# Altium PCB AcousticsSingleChannel.PcbDoc
Units mil, origin at the board's own origin, x right, y up, seen from the top; angles counter-clockwise.
Board outline 1008.83 x 2053.63 mil, 4 copper layers (Top Layer, Int1 (GND), Int2 (AGND), Bottom Layer), stack 53.912 mil thick; 53 components, 35 nets, 154 pads, 35 vias.
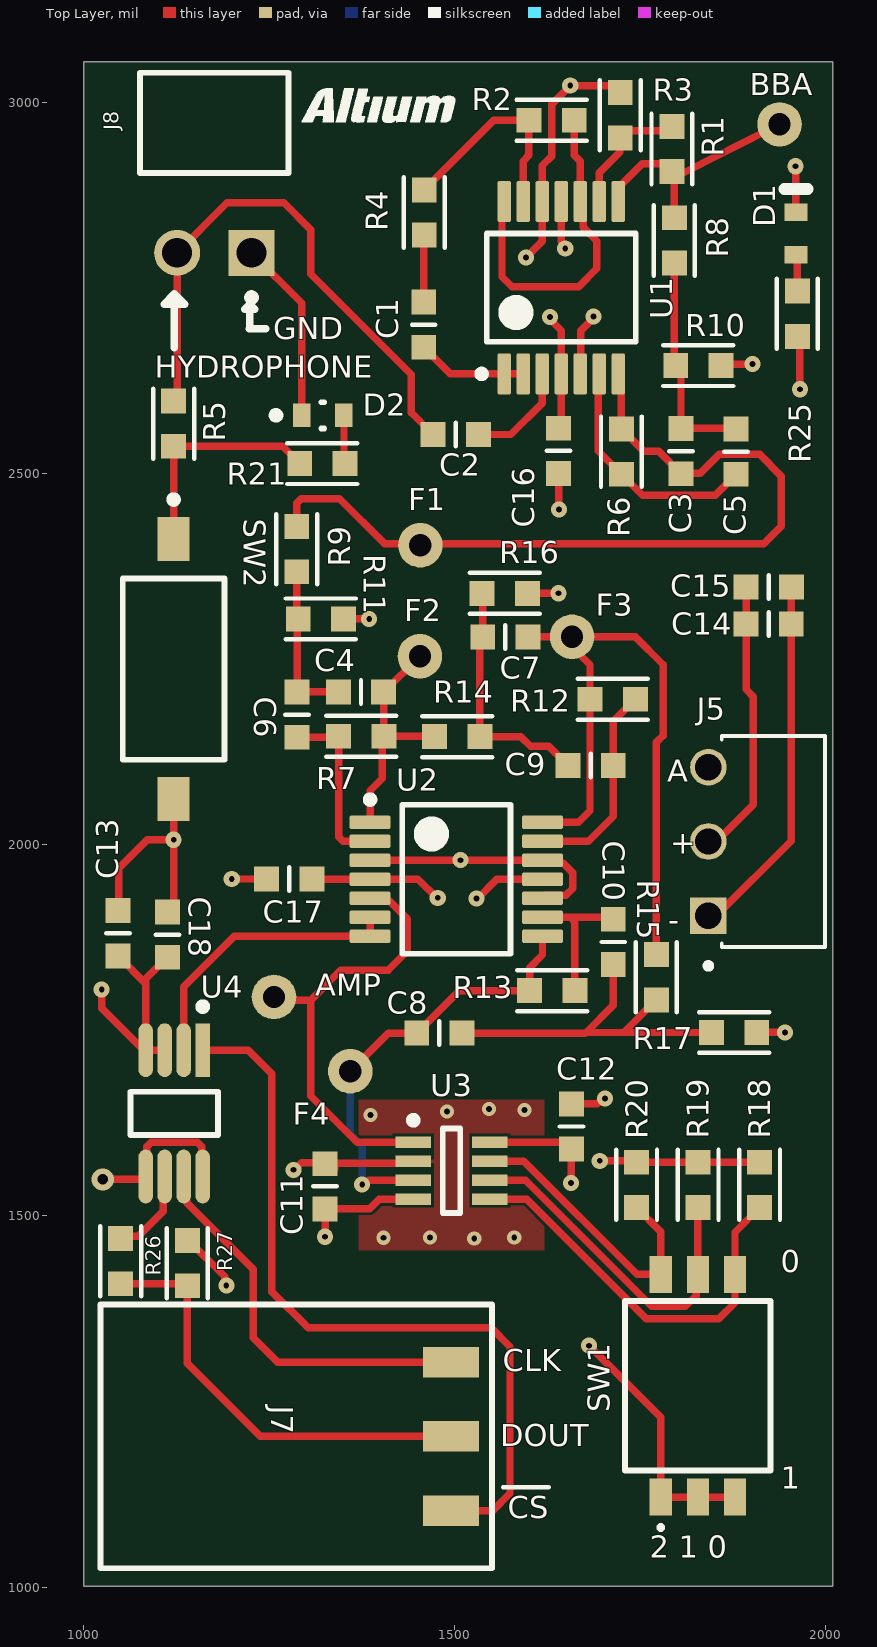
[diagram p0: Top Layer view]
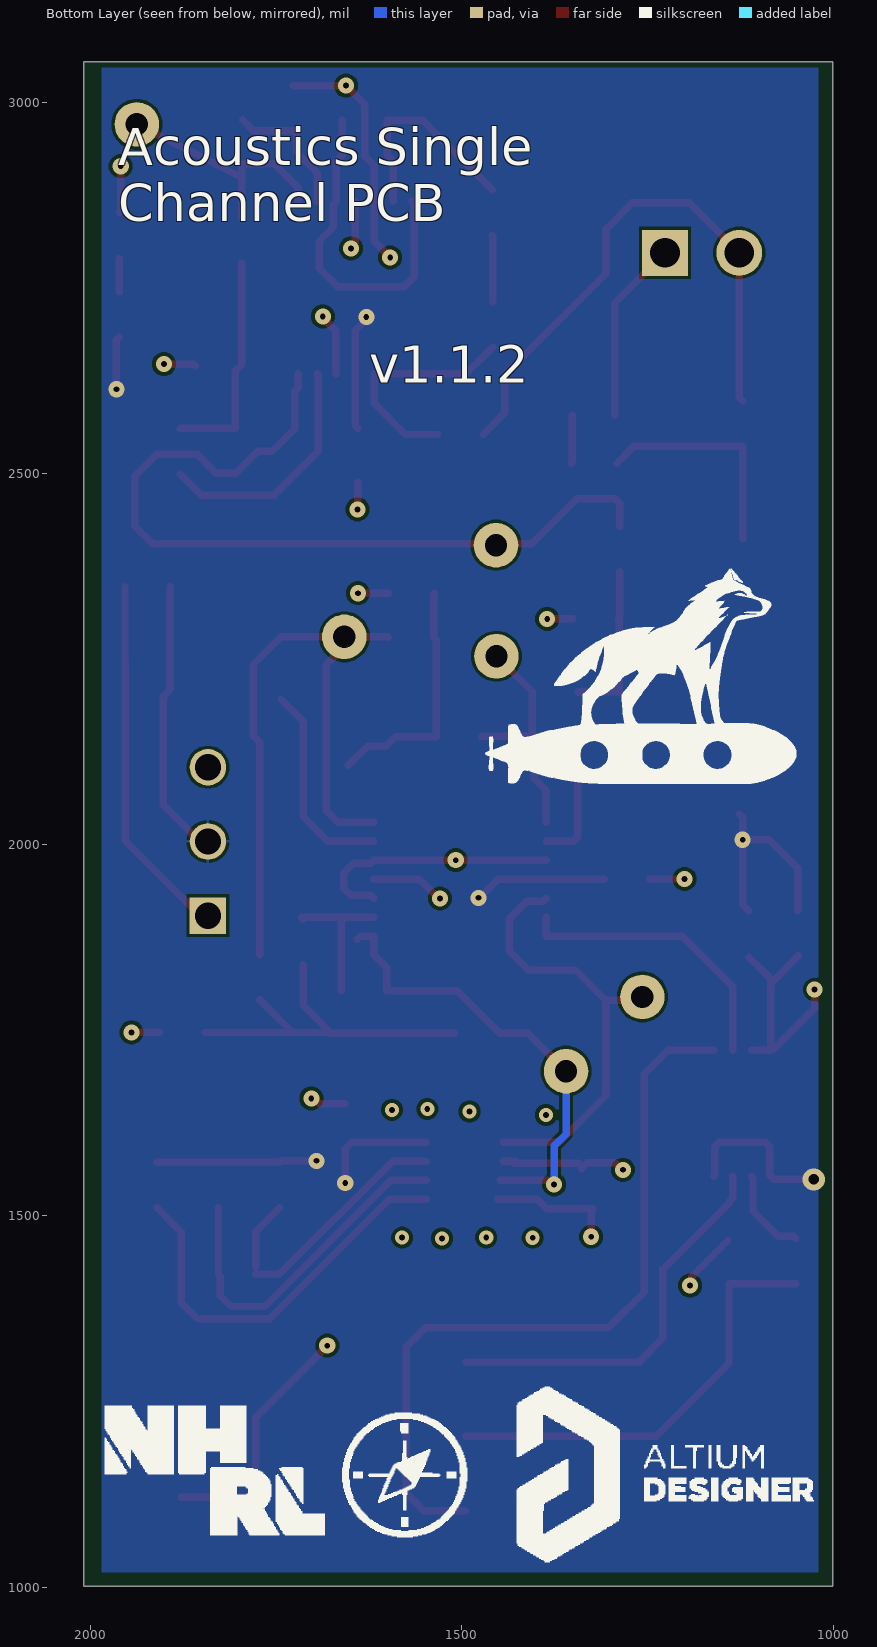
[diagram p1: Bottom Layer view, seen from below]
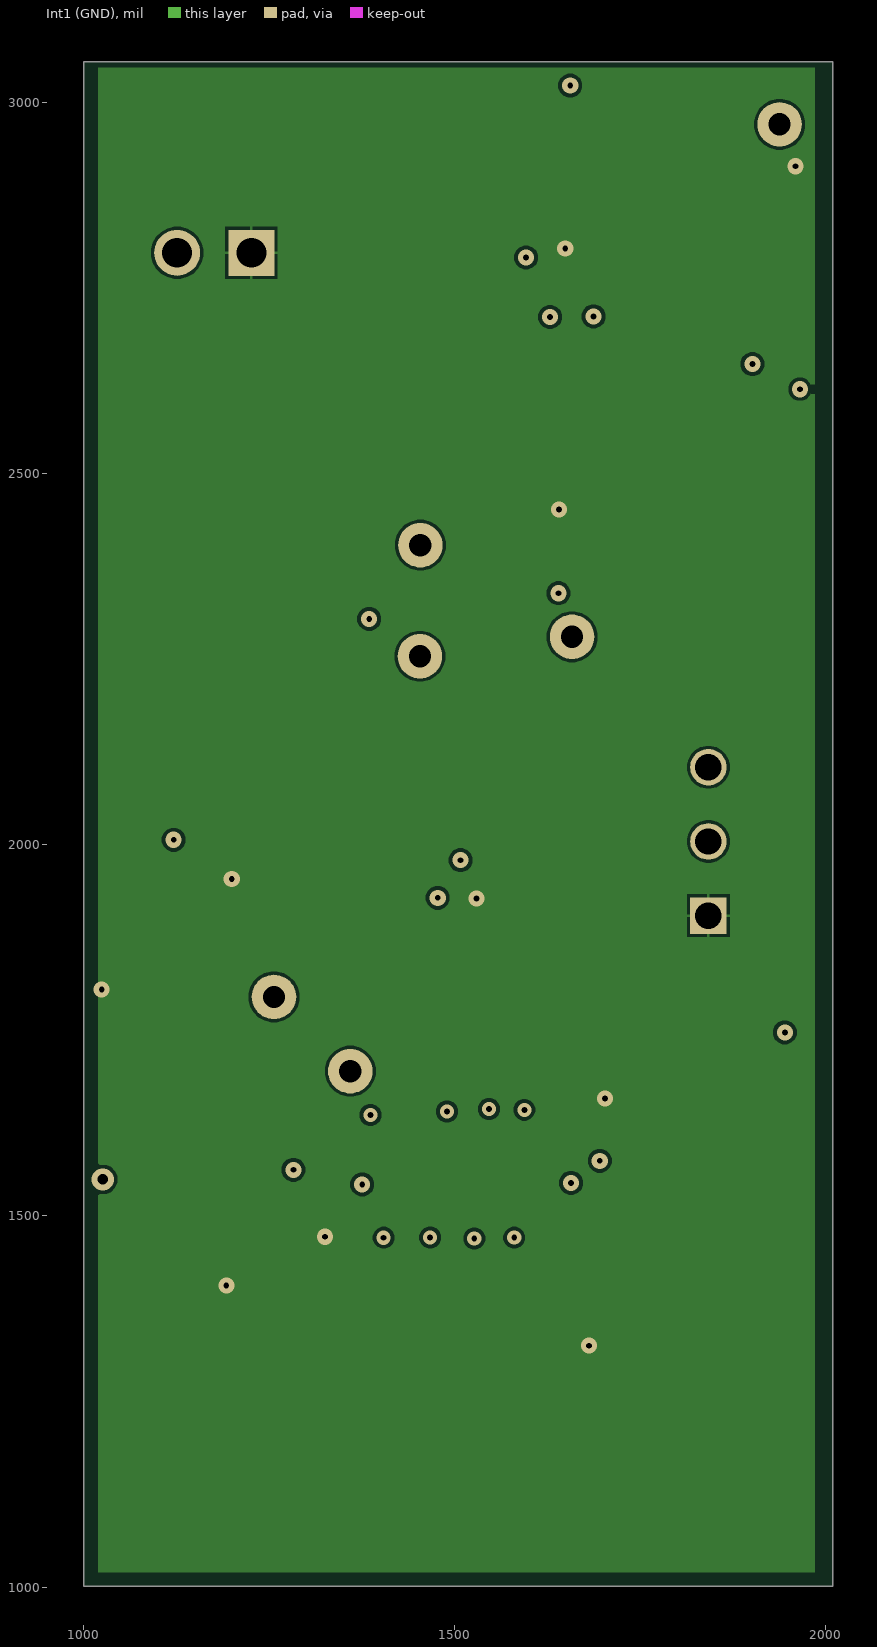
[diagram p2: Int1 (GND)]
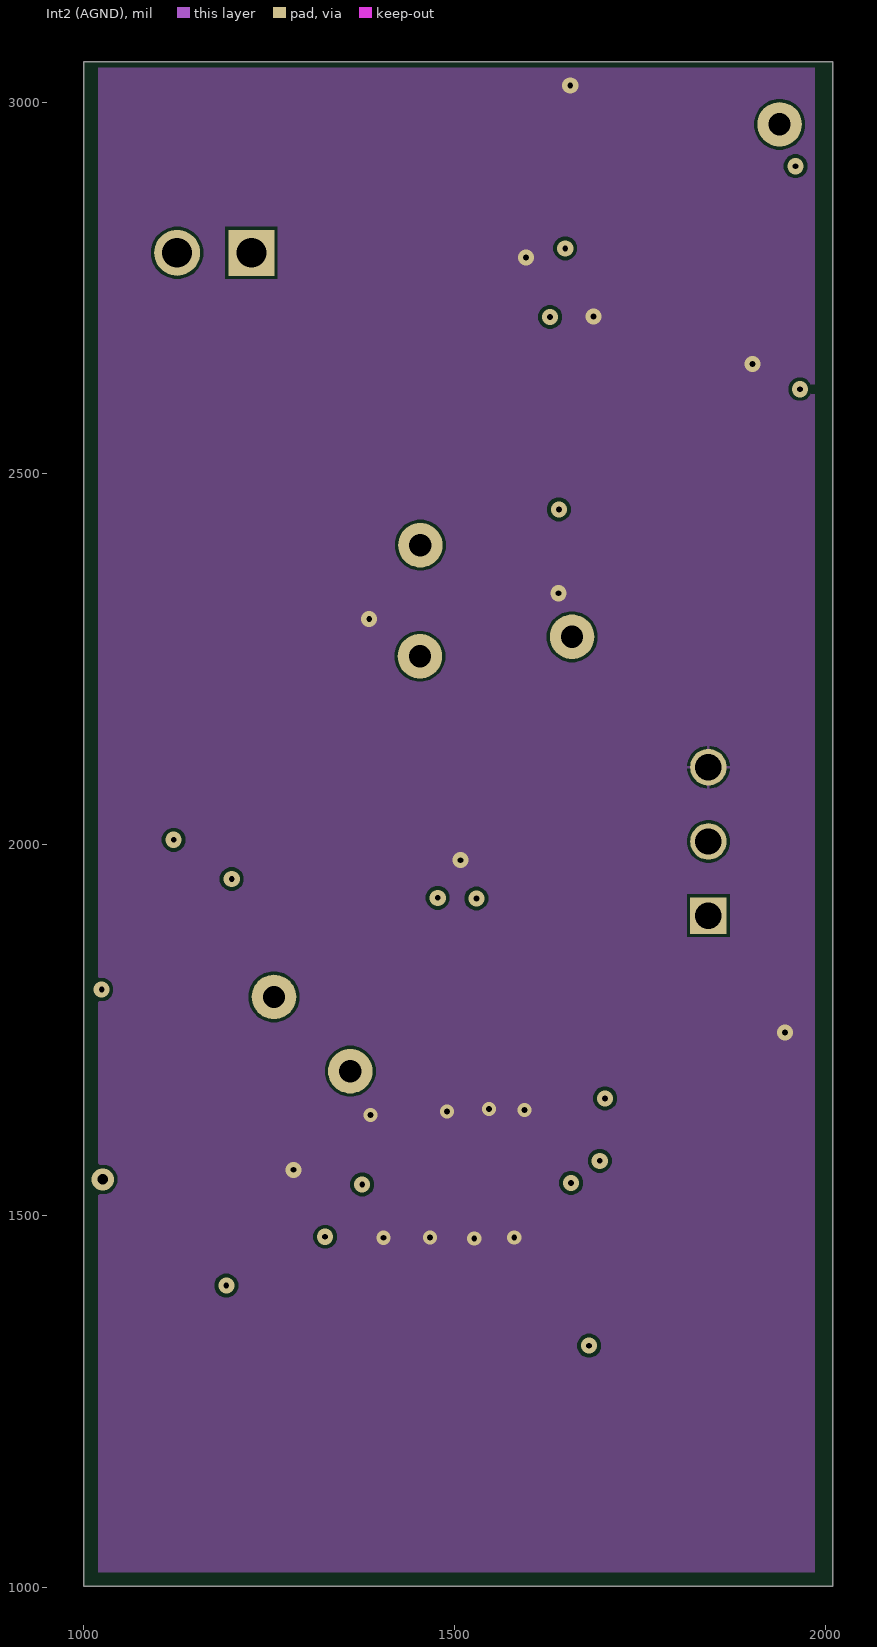
[diagram p3: Int2 (AGND)]
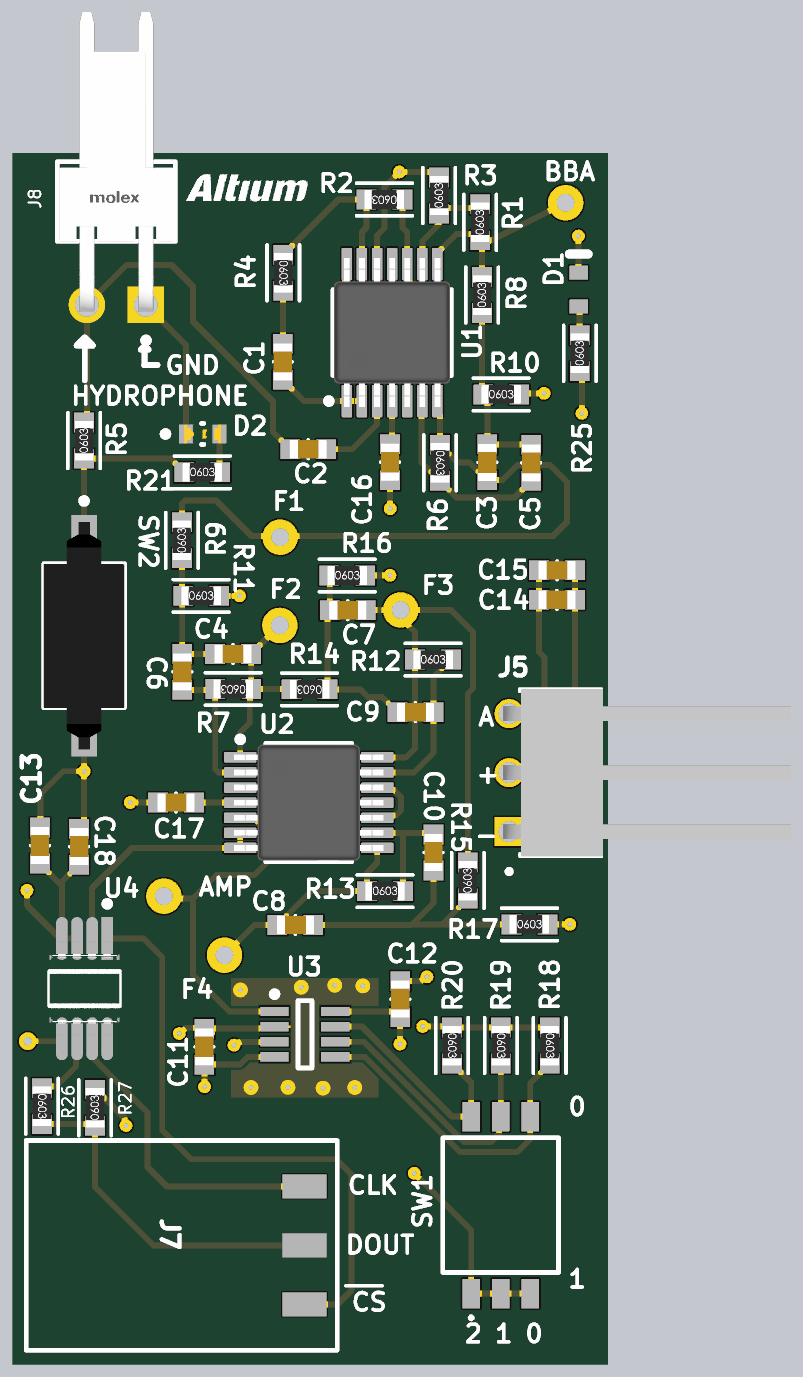
[diagram p4: 3D render of the assembled board from above, using the file's embedded part models]

## Layer stack, top to bottom
Top Solder: solder mask 1, SM-001, Dk 4
Top Layer: signal copper 1.378
Dielectric 1: prepreg 5.1, PP-017, Dk 4.3
Dielectric 2: prepreg 5.1, PP-017, Dk 4.3
Int1 (GND): signal copper 1.378
Dielectric 3: core 28, Core-039, Dk 4.8
Int2 (AGND): signal copper 1.378
Dielectric 4: prepreg 5.1, PP-017, Dk 4.3
Dielectric 5: prepreg 5.1, PP-017, Dk 4.3
Bottom Layer: signal copper 1.378
Bottom Solder: solder mask 1, SM-001, Dk 4

## Board outline
1000.59,1001.11 1000.59,3054.75 2009.42,3054.75 2009.42,1001.11

## Design rules (kind name [scope] priority, off if disabled: settings)
BoardOutlineClearance [All] p1: gap=7.87 ignorepadtopadclearanceinfootprint=FALSE
Clearance [All] p1: gap=4 ignorepadtopadclearanceinfootprint=FALSE except(5: Arc-Via Track-Via SMDPad-Via THPad-Via Via-Via Via-Fill Via-Poly Via-Region Via-Text; 9.84: Arc-Hole Track-Hole SMDPad-Hole THPad-Hole Via-Hole Fill-Hole Poly-Hole Region-Hole Text-Hole)
ComponentClearance [All] p1: gap=4 collisioncheckmode=3 verticalgap=4 showdistances=TRUE
DiffPairsRouting [All] p1: maxlimit=4 minlimit=4 mostfreqgap=4 toplayer_minwidth=4 toplayer_maxwidth=71497.94 toplayer_prefwidth=4 midlayer1_minwidth=4 midlayer1_maxwidth=71497.94 midlayer1_prefwidth=4 midlayer2_minwidth=4 midlayer2_maxwidth=71497.94 midlayer2_prefwidth=4 bottomlayer_minwidth=4 bottomlayer_maxwidth=71497.94 bottomlayer_prefwidth=4 maxuncoupledlength=500
Height [All] p1: minheight=0 maxheight=71497.94 prefheight=500
HoleSize [All] p1: absolutevalues=TRUE maxlimit=248.03 minlimit=7.87 maxpercent=80.000 minpercent=20.000
HoleToHoleClearance [All] p1: gap=9.84 allowstackedmicrovias=FALSE
MinimumAnnularRing [All] p1: minimumring=3
MinimumSolderMaskSliver [All] p1: minsoldermaskwidth=0
PlaneClearance [All] p1: clearance=4
PlaneConnect PlaneConnectPowerPads [InPadClass('PowerPads')] p1: planeconnectstyle=Direct reliefexpansion=20 reliefentries=4 reliefconductorwidth=10 reliefairgap=10
PlaneConnect [All] p2: pad.planeconnectstyle=Relief pad.reliefexpansion=11.81 pad.reliefentries=4 pad.reliefconductorwidth=4 pad.reliefairgap=4 via.planeconnectstyle=Direct via.reliefexpansion=11.81 via.reliefentries=4 via.reliefconductorwidth=5 via.reliefairgap=5
PolygonConnect PolygonConnectPowerPads [All vs (InPadClass('PowerPads'))] p1: connectstyle=Direct reliefconductorwidth=10 reliefentries=4 polygonreliefangle="90 Angle" airgapwidth=10
PolygonConnect [All] p2: thpad.connectstyle=Relief thpad.reliefconductorwidth=4 thpad.reliefentries=4 thpad.polygonreliefangle="90 Angle" thpad.airgapwidth=4 smdpad.connectstyle=Relief smdpad.reliefconductorwidth=4 smdpad.reliefentries=4 smdpad.polygonreliefangle="90 Angle" smdpad.airgapwidth=4 via.connectstyle=Direct via.reliefconductorwidth=5 via.reliefentries=4 via.polygonreliefangle="90 Angle" via.airgapwidth=5
RoutingVias [All] p1: holewidth=7.87 width=17.72 viastyle="Through Hole" minholewidth=7.87 minwidth=17.72 maxholewidth=248.03 maxwidth=257.87
SilkToSilkClearance [All] p1: silktosilkclearance=0
SilkToSolderMaskClearance [IsPad] p1: minsilkscreentomaskgap=4 clearancetoexposedcopper=TRUE
SolderMaskExpansion [All] p1: expansion=2.95 istentingtop=FALSE
Width [All] p1: maxlimit=71497.94 minlimit=4 preferedwidth=10
20 further rules are at their usual default settings.

## Classes and differential pairs
component class U_OutputAmplifier: C11 C12 R18 R19 R20 SW1 U3
component class U_BufferBiasAmp: C1 C2 C16 D2 R1 R2 R3 R4 R5 R21 SW2 U1
component class Channel: C13 C14 C15 C18 D1 J5 J7 J8 R25 R26 R27 U4
component class "U_Band Pass Filter": C3 C4 C5 C6 C7 C8 C9 C10 C17 R6 R7 R8 R9 R10 R11 R12 R13 R14 R15 R16 R17 U2

## Components (designator, comment, footprint, x,y, rotation, side; value= is the part's Value field where it differs from the comment)
C1 "5100pF" SMD-0603C 1458.56,2700.67 r0 top
C2 "5100pF" SMD-0603C 1501.63,2552.62 r90 top
C3 "1000pF" SMD-0603C 1805.18,2530.32 r0 top
C4 "1000pF" SMD-0603C 1374.08,2205.54 r90 top
C5 "1000pF" SMD-0603C 1879.44,2529.58 r0 top
C6 "1000pF" SMD-0603C 1288.09,2175.31 r0 top
C7 "1000pF" SMD-0603C 1568.59,2279.64 r90 top
C8 "1000pF" SMD-0603C 1479.7,1746.26 r270 top
C9 "1000pF" SMD-0603C 1683.39,2106.83 r90 top
C10 "1000pF" SMD-0603C 1713.93,1869.01 r180 top
C11 "1µF" SMD-0603C 1325.54,1539.72 r0 top
C12 "0.10µF" SMD-0603C 1657.77,1620.44 r0 top
C13 "1µF" SMD-0603C 1046.76,1880.72 r0 top
C14 "1µF" SMD-0603C 1923.09,2297.28 r270 top
C15 "1µF" SMD-0603C 1923.32,2347.31 r270 top
C16 "1µF" SMD-0603C 1640.2,2530.57 r180 top
C17 "1µF" SMD-0603C 1277.46,1953.65 r90 top
C18 "2.2µF" SMD-0603C 1113.22,1878.96 r0 top
D1 "TLMS1100-GS08" VISH-TLMX1100_V 1960.05,2823.29 r90 top value=1.9V
D2 "TLMP1100-GS08" FP-6_541-5056_01-4-MFG 1322.61,2578.41 r0 top
J5 "87233-3" TE_87233-3 1842.03,1904.39 r90 top
J7 "SAMTEC-SMH-103-02-X-S" SAMTEC-SMH-103-02-X-S 1208.66,1203.09 r270 top
J8 "22-05-3021" FP-22-05-3021-MFG 1176.4,2967.43 r180 top
R1 "10k" SMD-0603-RES 1792.96,2937.18 r0 top
R2 "10k" SMD-0603-RES 1630.81,2975.92 r90 top
R3 "1k" SMD-0603-RES 1723.36,2982.67 r0 top
R4 "10k" SMD-0603-RES 1459.25,2851.65 r180 top
R5 "4.7k" SMD-0603-RES 1121.63,2567.22 r0 top
R6 "54.9k" SMD-0603-RES 1724.93,2529.58 r180 top
R7 "41.2k" SMD-0603-RES 1374.48,2146.16 r90 top
R8 "17.4k" SMD-0603-RES 1796.26,2813.97 r0 top
R9 "13k" SMD-0603-RES 1287.52,2398.13 r0 top
R10 "698" SMD-0603-RES 1828.57,2645.48 r270 top
R11 "536" SMD-0603-RES 1320.04,2304.13 r270 top
R12 "165k" SMD-0603-RES 1713.12,2196.01 r270 top
R13 "86.6k" SMD-0603-RES 1631.72,1803.49 r270 top
R14 "11k" SMD-0603-RES 1503.77,2145.64 r90 top
R15 "5.76k" SMD-0603-RES 1772.05,1821.5 r0 top
R16 "332" SMD-0603-RES 1567.8,2338.53 r270 top
R17 "174" SMD-0603-RES 1876.62,1747.1 r270 top
R18 "10k" SMD-0603-RES 1910.94,1541.83 r180 top
R19 "10k" SMD-0603-RES 1828.1,1541.83 r180 top
R20 "10k" SMD-0603-RES 1745.26,1541.83 r180 top
R21 "300" SMD-0603-RES 1322.04,2513.5 r270 top
R25 "300" SMD-0603-RES 1961.97,2715.29 r0 top
R26 "750" SMD-0603-RES 1050.28,1439.09 r180 top
R27 "1k" SMD-0603-RES 1140.16,1436.42 r0 top
SW1 "416131160803" 416131160803 1827.86,1271.24 r0 top
SW2 "Switch_Omron_A6S-1104-PH_eec" Omron_A6S-1104-PH_0 1121.63,2236.6 r180 top
U1 "OPA1604AIPWR" PW0014A_N 1643.84,2750.37 r90 top
U2 "OPA1604AIPWR" PW0014A_N 1502.45,1953.51 r0 top
U3 "LTC6910-3CTS8#TRPBF" LT-TS8-8-TSOT-23_V 1496.06,1560.96 r0 top value=N/A
U4 "LTC1197LIMS8#PBF" FP-MS8-8-05-08-1660-IPC_A 1122.47,1638.24 r270 top

## Footprints (in the part's own frame and the unit in brackets; to place one, negate y for a bottom-side part, rotate by r counter-clockwise, add the part's x,y. Pads: shape width x height; smd on the part's side, far side on the other; paste and mask are expansions set on the pad)
416131160803 [mm]
  rect 0.76x1.27 smd: 1(-1.27,-3.81) 2(0,-3.81) 3(1.27,-3.81) 4(1.27,3.81) 5(0,3.81) 6(-1.27,3.81)
  silkscreen extent -2.49,-4.9 2.49,2.9
FP-6_541-5056_01-4-MFG [mm]
  rect 0.6x0.8 smd paste+0 mask+0: 1(-0.725,0) 2(0.725,0)
  silkscreen extent -1.72,-0.45 0.05,0.45, body extent -1.12,-0.55 1.12,0.55, height 0.25
FP-22-05-3021-MFG [mm]
  rect 1.57x1.57 hole 1.02 paste-1000 mask+0: 1(-1.27,4.32)
  round 1.57 hole 1.02 paste-1000 mask+0: 2(1.27,4.32)
  silkscreen extent -2.54,-1.84 2.54,5.97, body extent -2.64,-8.9 2.64,5.21, height 0.25
FP-MS8-8-05-08-1660-IPC_A [mm]
  rect 1.84x0.495 smd paste+0 mask+0: 1(-2.16,0.975)
  rrect100% 1.84x0.495 smd paste+0 mask+0: 2(-2.16,0.325) 3(-2.16,-0.325) 4(-2.16,-0.975) 5(2.16,-0.975) 6(2.16,-0.325) 7(2.16,0.325) 8(2.16,0.975)
  silkscreen extent -3.77,-1.5 0.74,1.5, body extent -3.58,-2 3.58,2, height 0.25
LT-TS8-8-TSOT-23_V [mm] "SOT23, 8-Leads, Body 2.90x1.63mm, Pitch 0.65mm, IPC High Density, Recommended"
  rect 1.22x0.4 smd: 1(-1.31,0.975) 2(-1.31,0.325) 3(-1.31,-0.325) 4(-1.31,-0.975) 5(1.31,-0.975) 6(1.31,-0.325) 7(1.31,0.325) 8(1.31,0.975)
  silkscreen extent -1.43,-1.45 0.3,1.85, body extent -0.87,-1.45 0.88,1.45, height 1
Omron_A6S-1104-PH_0 [mm]
  rect 1.1x1.5 smd paste+0 mask+0: 1(0,-4.45) 2(0,4.45)
  silkscreen extent -1.74,-5.92 1.74,3.1, body extent -1.94,-5.3 1.94,5.3, height 0.25
PW0014A_N [mm] "SOP, 14-Leads, Body 5.1x4.5mm, Pitch 0.65mm, IPC Medium Density"
  rrect22% 1.4x0.45 smd: 1(-2.95,1.95) 2(-2.95,1.3) 3(-2.95,0.65) 4(-2.95,0) 5(-2.95,-0.65) 6(-2.95,-1.3) 7(-2.95,-1.95) 8(2.95,-1.95) 9(2.95,-1.3) 10(2.95,-0.65) 11(2.95,0) 12(2.95,0.65) 13(2.95,1.3) 14(2.95,1.95)
  silkscreen extent -3.07,-2.55 1.85,2.85, body extent -3.21,-2.5 3.21,2.5, height 1
SAMTEC-SMH-103-02-X-S [mm]
  rect 1.04x1.91 smd mask+0.051: 1(-2.54,7.277) 3(2.54,7.277)
  rect 1.04x1.91 smd mask+0: 2(0,7.277)
  silkscreen extent -4.51,-4.7 4.51,8.68
SMD-0603-RES [mm]
  rect 0.85x0.85 smd: 1(0,0.775) 2(0,-0.775)
  silkscreen extent -0.7,-1.2 0.7,1.2, body extent -0.4,-0.85 0.4,0.85, height 0.56
SMD-0603C [mm]
  rect 0.85x0.85 smd: 1(0,0.775) 2(0,-0.775)
  silkscreen extent -0.4,0 0.4,0, body extent -0.4,-0.8 0.4,0.8, height 0.9
TE_87233-3 [mm]
  rect 1.25x1.25 hole 0.9: 1(0,0)
  round 1.25 hole 0.9: 2(2.54,0) 3(5.08,0)
  silkscreen extent -1.82,-3.99 6.15,0.1, body extent -1.07,-12.13 6.15,0.25, height 3.53
VISH-TLMX1100_V [mm] "SMD, 2-Leads, Body 1.6x0.8mm"
  rect 0.6x0.8 smd: 1(-0.725,0) 2(0.725,0)
  silkscreen extent 1.53,-0.4 1.53,0.4, body extent -0.8,-0.4 0.8,0.4, height 0.65

## Part data
C1: library part GRM1887U1H512JA01D, "CAP CER 5100PF 50V U2J 0603", Manufacturer="Murata Electronics North America", Operating Temperature="-55°C ~ 125°C", Package / Case="0603 (1608 Metric)", Datasheet Link=https://www.digikey.com/en/products/detail/murata-electronics/GRM1887U1H512JA01D/2612102, Manufacturer Part Number=GRM1887U1H512JA01D
C2: library part GRM1887U1H512JA01D, "CAP CER 5100PF 50V U2J 0603", Digi-Key Part Number=490-6399-1-ND, Manufacturer="Murata Electronics North America", Operating Temperature="-55°C ~ 125°C", Package / Case="0603 (1608 Metric)", Ratings=-, Temperature Coefficient=U2J, Tolerance=±5%, Voltage=50V, @ qty=0, Applications="General Purpose", Datasheets=http://www.murata.com/~/media/webrenewal/support/library/catalog/products/capacitor/mlcc/c02e.pdf, Factory Stock=0, Features=-, Height - Seated (Max)=-, Image=//media.digikey.com/Renders/Murata%20Renders/ZRB-SERIES-0402.jpg, Lead Spacing=-, Lead Style=-, Minimum Quantity=1, Mounting Type="Surface Mount, MLCC", Packaging="Cut Tape (CT)", Part Number=GRM1887U1H512JA01D, Part Status=Active, Quantity Available=12288, Series=GRM, Size / Dimension="0.063\" L x 0.031\" W (1.60mm x 0.80mm)", Thickness (Max)="0.035\" (0.90mm)", Unit Price (USD)=0.2
C3 C4 C5 C6 C7 C8 C9 C10: library part GCJ188R71H102KA01D, "CAP CER 1000PF 50V X7R 0603", Manufacturer="Walsin Technology Corporation", Manufacturer Part Number=0603N102F500CT, Operating Temperature="-55°C ~ 125°C", Package / Case="0603 (1608 Metric)", Datasheet Link=https://www.digikey.com/en/products/detail/walsin-technology-corporation/0603N102F500CT/9354972
C11: library part GCM188R71C105KA64D, "CAP CER 1UF 16V X7R 0603", Digi-Key Part Number=490-5241-1-ND, Manufacturer="Murata Electronics North America", Operating Temperature="-55°C ~ 125°C", Package / Case="0603 (1608 Metric)", Ratings=AEC-Q200, Temperature Coefficient=X7R, Tolerance=±10%, Voltage=16V, @ qty=0, Applications=Automotive, Datasheets=http://www.murata.com/~/media/webrenewal/support/library/catalog/products/capacitor/mlcc/c03e.ashx, Factory Stock=0, Features=-, Height - Seated (Max)=-, Image=//media.digikey.com/Renders/Murata%20Renders/0603%28GCM188%29.jpg, Lead Spacing=-, Lead Style=-, Minimum Quantity=1, Mounting Type="Surface Mount, MLCC", Packaging="Cut Tape (CT)", Part Number=GCM188R71C105KA64D, Part Status=Active, Quantity Available=9243, Series=GCM, Size / Dimension="0.063\" L x 0.031\" W (1.60mm x 0.80mm)", Thickness (Max)="0.035\" (0.90mm)", Unit Price (USD)=0.24
C12: library part GCJ188R71C104KA01D, "CAP CER 0.1UF 16V X7R 0603", Digi-Key Part Number=490-5796-1-ND, Manufacturer="Murata Electronics North America", Operating Temperature="-55°C ~ 125°C", Package / Case="0603 (1608 Metric)", Ratings=AEC-Q200, Temperature Coefficient=X7R, Tolerance=±10%, Voltage=16V, @ qty=0, Applications="Automotive, Boardflex Sensitive", Datasheets=http://www.murata.com/~/media/webrenewal/support/library/catalog/products/capacitor/mlcc/c03e.ashx, Factory Stock=0, Features="Soft Termination", Height - Seated (Max)=-, Image=//media.digikey.com/Renders/Murata%20Renders/0603%28LQG18%29.jpg, Lead Spacing=-, Lead Style=-, Minimum Quantity=1, Mounting Type="Surface Mount, MLCC", Packaging="Cut Tape (CT)", Part Number=GCJ188R71C104KA01D, Part Status=Active, Quantity Available=22473, Series=GCJ, Size / Dimension="0.063\" L x 0.031\" W (1.60mm x 0.80mm)", Thickness (Max)="0.035\" (0.90mm)", Unit Price (USD)=0.21
C13: library part GRM185C80J105KE26D, "CAP CER 1UF 6.3V X6S 0603", Digi-Key Part Number=490-8271-1-ND, Manufacturer="Murata Electronics North America", Operating Temperature="-55°C ~ 105°C", Package / Case="0603 (1608 Metric)", Ratings=-, Temperature Coefficient=X6S, Tolerance=±10%, Voltage=6.3V, @ qty=0, Applications="General Purpose", Datasheets=http://www.murata.com/~/media/webrenewal/support/library/catalog/products/capacitor/mlcc/c02e.pdf, Factory Stock=0, Features=-, Height - Seated (Max)=-, Image=//media.digikey.com/Renders/Murata%20Renders/ZRB-SERIES-0402.jpg, Lead Spacing=-, Lead Style=-, Minimum Quantity=1, Mounting Type="Surface Mount, MLCC", Packaging="Cut Tape (CT)", Part Number=GRM185C80J105KE26D, Part Status=Active, Quantity Available=11240, Series=GRM, Size / Dimension="0.063\" L x 0.031\" W (1.60mm x 0.80mm)", Thickness (Max)="0.020\" (0.50mm)", Unit Price (USD)=0.2
C14 C15 C16 C17: library part GCM188R71C105KA64D, "CAP CER 1UF 16V X7R 0603", Manufacturer="Samsung Electro-Mechanics", Manufacturer Part Number=CL10A105KA8NNNC, Operating Temperature="-55°C ~ 125°C", Package / Case="0603 (1608 Metric)", Datasheet Link=https://www.digikey.com/en/products/detail/samsung-electro-mechanics/CL10A105KA8NNNC/3886760
C18: library part GCM188R70J225KE22D, "CAP CER 2.2UF 6.3V X7R 0603", Digi-Key Part Number=490-5316-1-ND, Manufacturer="Murata Electronics North America", Operating Temperature="-55°C ~ 125°C", Package / Case="0603 (1608 Metric)", Ratings=AEC-Q200, Temperature Coefficient=X7R, Tolerance=±10%, Voltage=6.3V, @ qty=0, Applications=Automotive, Datasheets=http://www.murata.com/~/media/webrenewal/support/library/catalog/products/capacitor/mlcc/c03e.ashx, Factory Stock=0, Features=-, Height - Seated (Max)=-, Image=//media.digikey.com/Renders/Murata%20Renders/0603%28GCM188%29.jpg, Lead Spacing=-, Lead Style=-, Minimum Quantity=1, Mounting Type="Surface Mount, MLCC", Packaging="Cut Tape (CT)", Part Number=GCM188R70J225KE22D, Part Status=Active, Quantity Available=20695, Series=GCM, Size / Dimension="0.063\" L x 0.031\" W (1.60mm x 0.80mm)", Thickness (Max)="0.035\" (0.90mm)", Unit Price (USD)=0.23
D1: library part CMP-1666-00027-1, "LED, RED, 2.1 V, -40 to 100 degC, 2-Pin SMD (0603), RoHS, Tape and Reel", Manufacturer="Wurth Elektronics", Manufacturer Part Number=150080SS75000, Operating Temperature=-40to85degC, Package / Case="0805 (2012 Metric)", Datasheet Link=https://www.mouser.com/ProductDetail/Wurth-Elektronik/150080SS75000?qs=LlUlMxKIyB2zzpiaOzrUdw%3D%3D&mgh=1&gclid=Cj0KCQjwm6KUBhC3ARIsACIwxBhChbj4MsdASq_HKZ9IIHp_SBsI6cWeNQVHWnPWPX4ZaUjtoXFUdFUaAm30EALw_wcB, RoHS=Pb-Free
D2: library part CMP-02520-000009-1, "LED GREEN 0603 SMD", Ambient Temperature Range High=+100°C, Ambient Temperature Range Low=-40°C, Colour="Pure green", Forward Current=20mA, Forward Voltage=2.1V, Manufacturer=Vishay, Max Junction Temp=+120°C, Package=6.541-5056.01-4, Power Dissipation=90mW, Reverse Voltage=6V, Temperature="to +120°C", Automotive=Yes, Automotive Grade="Grade 3", Category=Diode, ComponentLink2Description=Datasheet, ComponentLink2URL=http://www.vishay.com/docs/83173/tlmb1100.pdf, Device Class L1=Optoelectronics, Device Class L2=LEDs, Device Class L3=unset, Digikey Description="LED GREEN 0603 SMD", Height=0.65mm, Lead Free=Yes, Led Orientation="Top View", Luminous Intensity=15mcd, Manufacturer Part Number=TLMP1100-GS08, Mouser Description="Standard LEDs - SMD Pure Green", Octopart=https://octopart.com/tlmp1100-gs08-vishay-55433993, Peak Emmision Wavelength=562nm, RoHS=TRUE, Temperature Range High=+120°C, Viewing Angle=160°, Wavelength=561nm
J5 J7: Package=None, Availability=Unavailable, Price=None
  J5: MF="{'manufacturer': u'TE Connectivity'}", MP=87233-3
  J7: MF="{'manufacturer': u'Samtec'}", MP=SAMTEC-SMH-103-02-X-S
J8: library part CMP-04776-000166-1, "CONN HEADER R/A 2POS 2.54MM", Color=White, Contact Resistance=10mR, Current Rating=4A, Flammability Rating="UL94 V-0", Max Operating Temperature=75°C, Max Voltage Rating (AC)=250V, Min Operating Temperature=0°C, Package Quantity=3000, Approvals=UL, Contact Material=Brass, Contact Mating Length=0.264inch, Contact Plating=Tin, Contact Type="Male Pin", Depth=12.83mm, Fastening Type=Friction, Gender=Male, Glow Wire Compliant=Non-compliant, Halogen Free="Low Halogen", Height=6.35mm, Housing Color=White, Housing Material=Nylon, Lead Free="Lead Free", Length=5.08mm, Max Current Rating=4A, Mount="Through Hole", Number of Circuits=2, Number of Contacts=2, Number of Positions=2, Number of Rows=1, Orientation="Right Angle", Packaging=Bulk, Pitch=2.54mm, Radiation Hardening=No, Series="KK® 7478", Termination=Solder, Voltage Rating=250V
R1 R2 R4 R18 R19 R20: library part ERJ-3EKF1002V, "RES SMD 10K OHM 1% 1/10W 0603", Manufacturer="Panasonic Electronic Components", Manufacturer Part Number=RNCP0603FTD10K0, Operating Temperature="-55°C ~ 155°C", Package / Case="0603 (1608 Metric)", Datasheet Link=https://www.digikey.com/en/products/detail/stackpole-electronics-inc/RNCP0603FTD10K0/2240139
R3: library part ERJ-3EKF1001V, "RES SMD 1K OHM 1% 1/10W 0603", Manufacturer="Stackpole Electronics Inc", Manufacturer Part Number=RNCP0603FTD1K00, Operating Temperature="-55°C ~ 155°C", Package / Case="0603 (1608 Metric)", Datasheet Link=https://www.digikey.com/en/products/detail/stackpole-electronics-inc/RNCP0603FTD1K00/2240106
R5: library part ERJ-3EKF4701V, "RES SMD 4.7K OHM 1% 1/10W 0603", Manufacturer="Panasonic Electronic Components", Operating Temperature="-55°C ~ 155°C", Package / Case="0603 (1608 Metric)", Datasheet Link=https://www.digikey.com/en/products/detail/panasonic-electronic-components/ERJ-3EKF4701V/1746419, Manufacturer Part Number=ERJ-3EKF4701V
R6: library part ERJ-3EKF5492V, "RES SMD 54.9K OHM 1% 1/10W 0603", Manufacturer="Panasonic Electronic Components", Operating Temperature="-55°C ~ 155°C", Package / Case="0603 (1608 Metric)", Datasheet Link=https://www.digikey.com/en/products/detail/panasonic-electronic-components/ERJ-3EKF5492V/196403, Manufacturer Part Number=ERJ-3EKF5492V
R7: library part ERJ-3EKF4122V, "RES SMD 41.2K OHM 1% 1/10W 0603", Manufacturer="Panasonic Electronic Components", Operating Temperature="-55°C ~ 155°C", Package / Case="0603 (1608 Metric)", Datasheet Link=https://www.digikey.com/en/products/detail/yageo/RC0603FR-0741K2L/727225, Manufacturer Part Number=ERJ-3EKF4122V
R8: library part ERJ-3EKF1742V, "RES SMD 17.4K OHM 1% 1/10W 0603", Manufacturer="Panasonic Electronic Components", Operating Temperature="-55°C ~ 155°C", Package / Case="0603 (1608 Metric)", Datasheet Link=https://www.digikey.com/en/products/detail/panasonic-electronic-components/ERJ-3EKF1742V/196159, Manufacturer Part Number=ERJ-3EKF1742V
R9: library part ERJ-3EKF1302V, "RES SMD 13K OHM 1% 1/10W 0603", Manufacturer="Panasonic Electronic Components", Operating Temperature="-55°C ~ 155°C", Package / Case="0603 (1608 Metric)", Datasheet Link=https://www.digikey.com/en/products/detail/panasonic-electronic-components/ERJ-3EKF1302V/196110, Manufacturer Part Number=ERJ-3EKF1302V
R10: library part ERJ-3EKF6980V, "RES SMD 698 OHM 1% 1/10W 0603", Manufacturer="Panasonic Electronic Components", Operating Temperature="-55°C ~ 155°C", Package / Case="0603 (1608 Metric)", Datasheet Link=https://www.digikey.com/en/products/detail/panasonic-electronic-components/ERJ-3EKF6980V/196453, Manufacturer Part Number=ERJ-3EKF6980V
R11: library part ERJ-3EKF5360V, "RES SMD 536 OHM 1% 1/10W 0603", Manufacturer="Panasonic Electronic Components", Operating Temperature="-55°C ~ 155°C", Package / Case="0603 (1608 Metric)", Datasheet Link=https://www.digikey.com/en/products/detail/panasonic-electronic-components/ERJ-3EKF5360V/196400, Manufacturer Part Number=ERJ-3EKF5360V
R12: library part ERJ-3EKF1653V, "RES SMD 165K OHM 1% 1/10W 0603", Manufacturer="Panasonic Electronic Components", Operating Temperature="-55°C ~ 155°C", Package / Case="0603 (1608 Metric)", Datasheet Link=https://www.digikey.com/en/products/detail/panasonic-electronic-components/ERJ-3EKF1653V/196155, Manufacturer Part Number=ERJ-3EKF1653V
R13: library part ERJ-3EKF8662V, "RES SMD 86.6K OHM 1% 1/10W 0603", Manufacturer="Panasonic Electronic Components", Operating Temperature="-55°C ~ 155°C", Package / Case="0603 (1608 Metric)", Datasheet Link=https://www.digikey.com/en/products/detail/panasonic-electronic-components/ERJ-3EKF8662V/196500, Manufacturer Part Number=ERJ-3EKF8662V
R14: library part ERJ-3EKF1102V, "RES SMD 11K OHM 1% 1/10W 0603", Manufacturer="Panasonic Electronic Components", Operating Temperature="-55°C ~ 155°C", Package / Case="0603 (1608 Metric)", Datasheet Link=https://www.digikey.com/en/products/detail/panasonic-electronic-components/ERJ-3EKF1102V/196083, Manufacturer Part Number=ERJ-3EKF1102V
R15: library part ERJ-3EKF5761V, "RES SMD 5.76K OHM 1% 1/10W 0603", Manufacturer="Panasonic Electronic Components", Operating Temperature="-55°C ~ 155°C", Package / Case="0603 (1608 Metric)", Datasheet Link=https://www.digikey.com/en/products/detail/panasonic-electronic-components/ERJ-3EKF5761V/196388, Manufacturer Part Number=ERJ-3EKF5761V
R16: library part ERJ-3EKF3320V, "RES SMD 332 OHM 1% 1/10W 0603", Manufacturer="Panasonic Electronic Components", Operating Temperature="-55°C ~ 155°C", Package / Case="0603 (1608 Metric)", Datasheet Link=https://www.digikey.com/en/products/detail/panasonic-electronic-components/ERJ-3EKF3320V/196300, Manufacturer Part Number=ERJ-3EKF3320V
R17: library part ERJ-3EKF1740V, "RES SMD 174 OHM 1% 1/10W 0603", Manufacturer="Panasonic Electronic Components", Operating Temperature="-55°C ~ 155°C", Package / Case="0603 (1608 Metric)", Datasheet Link=https://www.digikey.com/en/products/detail/panasonic-electronic-components/ERJ-3EKF1740V/196162, Manufacturer Part Number=ERJ-3EKF1740V
R21 R25: library part ERJ-3EKF3000V, "RES SMD 300 OHM 1% 1/10W 0603", Manufacturer="Panasonic Electronic Components", Operating Temperature="-55°C ~ 155°C", Package / Case="0603 (1608 Metric)", Datasheet Link=https://www.digikey.com/en/products/detail/panasonic-electronic-components/ERJ-3EKF3000V/1746363, Manufacturer Part Number=ERJ-3EKF3000V
R26: library part ERJ-3EKF7500V, "RES SMD 750 OHM 1% 1/10W 0603", Digi-Key Part Number=P750HCT-ND, Manufacturer="Panasonic Electronic Components", Operating Temperature="-55°C ~ 155°C", Package / Case="0603 (1608 Metric)", Power (Watts)="0.1W, 1/10W", Supplier Device Package=0603, Temperature Coefficient=±100ppm/°C, Tolerance=±1%, @ qty=1500, Composition="Thick Film", Datasheets=http://industrial.panasonic.com/www-cgi/jvcr13pz.cgi?E+PZ+3+AOA0002+ERJ3EKF7500V+7+WW, Factory Stock=0, Failure Rate=-, Features="Automotive AEC-Q200", Height - Seated (Max)="0.022\" (0.55mm)", Image=//media.digikey.com/Photos/Panasonic%20Photos/MFG_ERJ-P6W%20Series.jpg, Minimum Quantity=1, Number of Terminations=2, Packaging="Cut Tape (CT)", Part Number=ERJ-3EKF7500V, Part Status=Active, Quantity Available=102837, Series=ERJ, Size / Dimension="0.063\" L x 0.031\" W (1.60mm x 0.80mm)", Unit Price (USD)=0.00379
R27: library part ERJ-3EKF1001V, "RES SMD 1K OHM 1% 1/10W 0603", Digi-Key Part Number=P1.00KHCT-ND, Manufacturer="Panasonic Electronic Components", Operating Temperature="-55°C ~ 155°C", Package / Case="0603 (1608 Metric)", Power (Watts)="0.1W, 1/10W", Supplier Device Package=0603, Temperature Coefficient=±100ppm/°C, Tolerance=±1%, @ qty=1500, Composition="Thick Film", Datasheets=http://industrial.panasonic.com/www-cgi/jvcr13pz.cgi?E+PZ+3+AOA0002+ERJ3EKF1001V+7+WW, Factory Stock=0, Failure Rate=-, Features="Automotive AEC-Q200", Height - Seated (Max)="0.022\" (0.55mm)", Image=//media.digikey.com/Photos/Panasonic%20Photos/MFG_ERJ-P6W%20Series.jpg, Minimum Quantity=1, Number of Terminations=2, Packaging="Cut Tape (CT)", Part Number=ERJ-3EKF1001V, Part Status=Active, Quantity Available=5218845, Series=ERJ, Size / Dimension="0.063\" L x 0.031\" W (1.60mm x 0.80mm)", Unit Price (USD)=0.00379
SW1: "Switch", Manufacturer_Name="Wurth Elektronik", Mouser Part Number=710-416131160803, Datasheet Link=https://www.we-online.com/catalog/datasheet/416131160803.pdf, Height=2.65mm, Manufacturer_Part_Number=416131160803, Mouser Price/Stock=https://www.mouser.co.uk/ProductDetail/Wurth-Elektronik/416131160803?qs=2kOmHSv6VfS5Uv9iBh18ZA%3D%3D
SW2: "SWITCH SLIDE DIP SPST 25MA 24V", Digikey Part Number=A6S-1104-PH-ND, Manufacturer=Omron, Mouser Part Number=653-A6S1104PH, Package=SMT_SW, Part Number=A6S-1104-PH, Temperature="-20°C to +70°C", Temperature Range High=+70°C, Temperature Range Low=-20°C, Voltage=24V, ComponentLink1Description=Upverter, ComponentLink1URL=https://upverter.com/upn/revision/12a774d2564c312a/, ComponentLink2Description=Datasheet, ComponentLink2URL=http://www.omron.com/ecb/products/pdf/en-a6s.pdf, Digikey Description="SWITCH SLIDE DIP SPST 25MA 24V", helpURL=https://upverter.com/upn/revision/12a774d2564c312a/, Lead Free=yes, Price=1.25010001648, RoHS=TRUE, Supplier 1=Digi-Key, Supplier 2=Mouser, Supplier Part Number 1=A6S-1104-PH-ND, Supplier Part Number 2=653-A6S1104PH
U1 U2: library part CMP-0272-01731-3, "Sound Plus High-Performance, Bipolar-Input Audio Operational Amplifier, 4.5 to 36 V, -40 to 85 degC, 14-pin SOP (PW14), Green (RoHS & no Sb/Br)", Manufacturer="Texas Instruments", Operating Temperature="-40°C ~ 85°C", Package / Case=14-TSSOP, Datasheet Link=https://www.digikey.com/en/products/detail/texas-instruments/OPA1604AIPWR/2793768, Manufacturer Part Number=OPA1604AIPWR
U3: library part CMP-0359-03721-2, Manufacturer="Analog Devices Inc.", Manufacturer Part Number=LTC6910-3CTS8#TRMPBF, Operating Temperature="0°C ~ 70°C", Package / Case=TSOT-23-8, Datasheet Link=https://www.analog.com/media/en/technical-documentation/data-sheets/6910fb.pdf, RoHS=Pb-Free
U4: library part CMP-09081-000582-1, "IC ADC 10BIT SAR 8MSOP", Case/Package=MSOP, Max Operating Temperature=85°C, Max Power Dissipation=25mW, Max Supply Voltage=4V, Min Operating Temperature=-40°C, Min Supply Voltage=2.7V, Operating Supply Voltage=3V, Package Quantity=50, Power Dissipation=500mW, Integral Nonlinearity (INL)=1LSB, Interface=SPI, Lead Free="Lead Free", Mount="Surface Mount", Number of Bits=10, Number of Converters=1, Number of Elements=1, Number of Pins=8, Packaging=Rail/Tube, Polarity=Unipolar, Resolution=10b, RoHS Compliant=Yes, Sampling Rate=250000S/s, Supply Type=Single

## Free pads (board coordinates)
  round 60 hole 30: 2(1454.07,2403.49) 3(1453.51,2253.89) 4(1658.36,2280.11) 5(1359.68,1694.93) 6(1937.87,2970.36) 7(1256.88,1794.94)

## Via types
v1: diameter 21.65, hole 7.87, Top Layer to Bottom Layer, 26 vias
v2: diameter 19, hole 7.9, Top Layer to Bottom Layer, 8 vias
v3: diameter 30, hole 14, Top Layer to Bottom Layer, 1 vias

## Nets (pads, with @x,y where several pads share a name; then routed paths per layer and width w, separated by ;. In a path a pad name is that pad's centre, name@x,y a point inside that pad or via, vN(x,y) a via of type N, cw(c..) or ccw(c..) an arc to the next point about the centre after c; other vN are vias at no path point)
AGND: C11.1 J5.3 R3.1 R10.1 R11.1 R16.1 R17.1 U1.5 U1.12 U2.3 U2.10 U2.12 U3.2 | length 1089.9
  Top Layer w10: v1(1283.11,1562.1) 1284.57,1562.1 1294.36,1571.89 1331.18,1571.89 1338.82,1564.25 C11.1@1338.82,1563.16 ; 1342.91,1570.8 1430.29,1570.8 1427.33,1573.75 U3.2 ; R11.1 v1(1385.11,2304.13) ; U2.3 U2.3 1508.29,1979.14 v1(1508.32,1979.18) 1508.36,1979.14 U2.12 1622.45,1975.24 1646.28,1975.24 1659.15,1962.37 1659.15,1941.08 1649.84,1931.78 1622.45,1931.78 U2.10 ; v1(1596.56,2790.99) 1596.56,2791.21 1618.25,2812.9 U1.12 1618.25,2914.97 1630.81,2927.54 1630.81,2997.48 v1(1655.95,3022.63) 1727.42,3022.63 R3.1@1727.52,3022.73 ; R16.1 1598.57,2338.8 v1(1640.04,2338.8) ; U1.5 1670.04,2634.85 1670.04,2692.42 1687.38,2709.75 v1(1687.38,2711.61) ; R10.1 1860.96,2647.36 v1(1901.36,2647.36) ; R17.1 1907.28,1747.25 v1(1945.01,1747.25)
  other v2: 1526.69,1469.6 1404.63,1470.65 1467.24,1471 1580.48,1470.7 1386.74,1636.01 1489.84,1640.66 1594.12,1642.89 1546.58,1643.89
Amp_Out: pad.7 U2.5 U3.1 | length 606.5
  Top Layer w10: pad.7 1261.06,1790.76 1306.5,1790.76 ; U2.5 1390.17,1924.06 1412.58,1924.06 1436.34,1900.3 1436.34,1856.91 1410.63,1831.19 1346.93,1831.19 1306.5,1790.76 ; U3.1 1368.67,1599.34 1306.5,1661.51 1306.5,1790.76
"BBA IN": C2.1 J8.2 R5.1 | length 768.5
  Top Layer w10: R5.1 1126.4,2602.51 J8.2 1193.65,2864.58 1270.31,2864.58 1306.29,2828.59 1306.29,2768.85 1442.07,2633.07 1442.07,2581.67 C2.1
"BBA OUT": pad.6 R1.2 R8.1 U1.8 | length 342.3
  Top Layer w4: R1.2 1796.26,2903.38 R1.2@1799.31,2900.32
  Top Layer w10: U1.8 1720.61,2885.21 1752.71,2917.31 R1.2@1795.53,2917.31 ; R1.2@1795.53,2915.32 1796.26,2914.59 1796.26,2903.38 R8.1 ; R1.2@1799.31,2900.32 pad.6
BBAmp_IN: R2.2 U1.10 U1.14 | length 458.6
  Top Layer w10: U1.14 1563.98,2863.43 1563.98,2765.21 1577.46,2751.72 1667.45,2751.72 1691.91,2776.18 1691.91,2813.18 1673.28,2831.81 1673.28,2862.65 U1.10 1669.43,2920.65 1661.32,2928.75 R2.2
BIAS_IN: C1.1 R4.1 | length 90.2
  Top Layer w10: C1.1 1458.56,2820.44 R4.1
"BPF OUT": C8.2 pad.5 R13.2 U2.8 U3.3 | length 625
  Top Layer w10: pad.5 1411.01,1746.26 C8.2 1506.42,1803.49 R13.2 1601.21,1834.47 1618.59,1851.86 U2.8 1637.29,1876.74 U2.8@1641.15,1872.88 ; v1(1375.72,1542.52) 1378.87,1542.52 1384.3,1547.95 U3.3@1448.28,1547.95
  Bottom Layer w10: pad.5 1359.68,1610.4 1375.72,1594.37 v1(1375.72,1542.52)
BUF_OUT: C1.2 U1.1 U1.2 | length 149
  Top Layer w10: C1.2 1494.48,2634.23 U1.1 U1.2
F1_In: C3.1 C5.1 R8.2 R10.2 | length 300.9
  Top Layer w10: R8.2 1796.26,2647.28 R10.2 1805.18,2638.36 C3.1 1878.71,2560.83 C5.1
F1_Out: C3.2 pad.2 R6.2 R9.1 U1.7 | length 1128.4
  Top Layer w10: R9.1 1287.52,2460.08 1293.37,2465.94 1345.12,2465.94 1405.83,2405.23 1454.07,2405.23 1916.43,2405.23 1940.44,2429.25 1940.44,2496.32 1910.96,2525.8 1856.71,2525.8 1831.05,2500.14 1805.51,2500.14 C3.2 1775.03,2529.95 1755.08,2529.95 R6.2 1724.93,2611.21 1720.61,2615.53 U1.7
F2_In: C4.1 C6.1 R9.2 R11.2 | length 218.8
  Top Layer w10: R9.2 1287.52,2306.14 R11.2 1288.09,2302.68 C6.1 1343.29,2205.83 C4.1
F2_Out: C4.2 pad.3 R7.2 R14.1 U2.1 | length 320.4
  Top Layer w10: U2.1 1386.31,2073 1402.54,2089.23 1402.54,2143.7 R7.2 ; pad.3 1404.83,2205.77 C4.2 1404.99,2205.14 R7.2 ; R14.1 1472.75,2146.16 R7.2
F3_In: C7.1 C9.1 R14.2 R16.2 | length 329.5
  Top Layer w10: R16.2 1538.08,2337.74 C7.1 1534.29,2275.85 R14.2 1589.43,2145.64 1602.36,2132.7 1627.01,2132.7 C9.1
F3_Out: C7.2 pad.4 R12.2 R15.1 U2.14 | length 906.7
  Top Layer w10: C7.2 1599.57,2280.11 pad.4 ; U2.14 1667.02,2030.28 1682.61,2045.87 R12.2 1682.61,2242.33 1658.36,2266.58 pad.4 ; R15.1 1772.05,2137.89 1780.95,2146.79 1780.95,2242.8 1743.64,2280.11 pad.4
F4_In: C8.1 C10.1 R15.2 R17.2 | length 504.9
  Top Layer w10: C8.1 1676.45,1746.26 1677.29,1747.1 ; C10.1 1713.93,1783.74 1677.29,1747.1 ; R15.2 1728.16,1747.1 ; R17.2 1728.16,1747.1 ; 1677.29,1747.1 1728.16,1747.1
G0: R18.1 SW1.4 U3.5 | length 547.6
  Top Layer w10: U3.5 1597.63,1522.57 1758.6,1361.6 1856.18,1361.6 1877.86,1383.28 SW1.4 1877.86,1478.25 R18.1
G1: R19.1 SW1.5 U3.6 | length 474.1
  Top Layer w4: SW1.5@1825.41,1418.79 SW1.5
  Top Layer w10: U3.6 1595.65,1548.16 1765.79,1378.02 1810.85,1378.02 1825.41,1392.58 SW1.5@1825.41,1418.79 ; SW1.5 1827.86,1511.09 R19.1
G2: R20.1 SW1.6 U3.7 | length 386.9
  Top Layer w10: U3.7 1593.33,1573.75 1745.84,1421.24 SW1.6 ; R20.1 1777.86,1478.71 SW1.6@1777.86,1431.28
GND: C11.2 C12.1 C13.2 C14.1 C15.1 C16.1 C17.1 C18.2 D1.2 D2.1 J5.1 J8.1 R27.1 SW1.1 SW1.2 SW1.3 U1.11 U2.11 U3.4 U4.3 U4.4 | length 2011
  Top Layer w10: v1(1024.82,1804.85) 1024.82,1779.52 1075.27,1729.07 1076.56,1727.73 1079.42,1724.88 ccw(c1084.92,1733.23) 1080.31,1724.36 U4.4@1084.08,1724.36 ; C13.2 1084.08,1812.88 ; U4.3 U4.4 U4.4@1084.08,1724.36 ; C18.2 1084.08,1819.31 1084.08,1812.88 ; R27.1@1141.5,1467.38 1190.44,1418.43 1190.44,1408.39 v1(1192.67,1406.16) ; v1@1198.83,1953.8 v1(1199.96,1953.8) 1246.81,1953.8 C17.1 ; J8.1 1294.06,2729.67 D2.1 ; v1(1325.82,1471.95) 1325.82,1507.5 1323.54,1509.77 1385.91,1509.77 1398.5,1522.36 U3.4@1452.07,1522.36 ; v1(1529.46,1927.59) 1531.23,1927.59 1557.16,1953.51 U2.11 ; C16.1@1640.2,2488.15 1640.2,2452.15 v1(1640.58,2451.77) ; U1.11 1643.84,2812.92 1649.19,2807.56 v1@1649.19,2805.99 ; C12.1 1692.34,1650.91 1699.68,1658.24 v1(1702.83,1658.24) ; v1(1681.34,1325.21) 1777.86,1228.69 SW1.1 SW1.2 SW1.3 ; J5.1@1853.28,1904.78 1953.6,2005.1 1953.6,2246.72 1953.84,2246.96 C15.1 ; v1(1959.56,2913.94) 1959.56,2852.98 D1.2@1960.7,2851.84 ; U4.4@1084.08,1724.36 1084.08,1812.88
  other v1: 1649.19,2803.36
NetC2_2: C2.2 U1.3 | length 143
  Top Layer w10: C2.2 1576.06,2552.62 1618.25,2594.81 U1.3
NetC5_2: C5.2 R6.1 U1.6 | length 326.7
  Top Layer w10: U1.6 1693.62,2632.83 1693.62,2530.38 R6.1 1753.33,2470.67 1851.04,2470.67 C5.2
NetC6_2: C6.2 R7.1 U2.2 | length 237.5
  Top Layer w10: C6.2@1288.59,2145.31 C6.2 1342.62,2144.8 R7.1 1343.97,2010.55 1349.83,2004.69 U2.2
NetC9_2: C9.2 R12.1 U2.13 | length 279.4
  Top Layer w10: U2.13 1680.58,2004.69 1713.9,2038.01 C9.2 1713.9,2166.28 R12.1
NetC10_2: C10.2 R13.1 U2.9 | length 201.5
  Top Layer w10: U2.9 1656.37,1902.33 ; R13.1 1662.23,1896.47 1656.37,1902.33 ; C10.2@1716.6,1902.19 C10.2 1711.12,1902.33 1656.37,1902.33
NetD1_1: D1.1 R25.1 | length 44.4
  Top Layer w10: R25.1@1961.67,2744.66 D1.1@1961.67,2789.06
NetD2_2: D2.2 R21.1 | length 65.5
  Top Layer w10: D2.2 1351.15,2514.91 R21.1
NetJ7_1: J7.1 U4.7 | length 535.8
  Top Layer w10: U4.7 1135.27,1524.15 1140.01,1519.41 1140.01,1517.12 1229.16,1427.96 1229.16,1335.82 1261.9,1303.09 J7.1
NetJ7_2: J7.2 R26.1 R27.2 | length 595.2
  Top Layer w4: R27.2@1139.94,1407.91 R27.2@1141.5,1406.35
  Top Layer w10: R26.1@1050.07,1408.63 1140.16,1408.63 1140.16,1301.47 1238.54,1203.09 J7.2
NetJ7_3: J7.3 U4.1 | length 1038
  Top Layer w10: U4.1 1222.4,1723.27 1254.08,1691.58 1254.08,1397.94 1302.88,1349.14 1549.55,1349.14 1574.78,1323.91 1574.78,1126.57 1551.3,1103.09 J7.3
NetR1_1: R1.1 R3.2 U1.9 | length 182.7
  Top Layer w10: U1.9 1695.02,2905.16 1722.82,2932.97 1722.82,2957 1727.52,2961.7 1780.89,2961.7 R1.1@1795.53,2976.34
NetR2_1: R2.1 R4.2 U1.13 | length 292.5
  Top Layer w10: R4.2 1553.01,2975.92 R2.1 1600.3,2928.52 1592.65,2920.88 U1.13
NetR5_2: R5.2 R21.2 SW2.1 | length 304.4
  Top Layer w10: SW2.1 R5.2 1268.32,2536.71 R21.2
NetR26_2: R26.2 U4.6 | length 120.4
  Top Layer w10: R26.2 1053.21,1472.53 1073.96,1472.53 1107.86,1506.43 1107.86,1551.39 U4.6
Sig_Out: U2.6 U2.7 U4.2 | length 390.3
  Top Layer w10: U4.2 1135.27,1808.82 1203.19,1876.74 U2.7 U2.6
VCC: C12.2 C13.1 C14.2 C15.2 C16.2 C17.2 C18.1 J5.2 R18.2 R19.2 R20.2 R25.2 SW2.2 U1.4 U2.4 U3.8 U4.5 U4.8 | length 1653.6
  Top Layer w10: v3(1026.21,1549.15) 1080.03,1549.15 U4.5 1085.56,1554.68 1085.56,1593.2 1091.42,1599.06 1153.52,1599.06 1159.38,1593.2 1159.38,1554.68 U4.8 ; C13.1@1047.64,1911.09 1047.64,1968.28 1086.06,2006.69 v1(1121.78,2006.69) ; C18.1@1113.66,1910.86 1121.78,1918.98 v1(1121.78,2006.69) ; SW2.2@1126.18,2041.43 1121.78,2037.03 v1(1121.78,2006.69) ; C17.2 1308.12,1953.51 U2.4 1450.84,1953.51 v1@1476.64,1927.7 ; U3.8 1648.36,1599.34 C12.2 1657.12,1589.27 v1(1657.12,1544.42) ; v1(1628.74,2710.9) 1628.74,2707.75 1643.84,2692.65 U1.4 1643.84,2564.72 C16.2 ; v1(1695.7,1574.23) 1743.37,1574.23 R20.2 R19.2 R18.2 ; J5.2@1853.28,2004.78 1902.28,2053.78 1902.28,2199.59 1892.81,2209.06 C15.2 ; R25.2@1961.67,2683.64 1965.35,2679.96 v1(1965.35,2613.55)
  other v1: 1477.45,1928.51

## Polygon pours and split planes (outlines as drawn)
AGND on Top Layer "AGND_L01_P011" (solid, pour order 11): 1371.06,1656.4 1371.06,1453.8 1621.06,1453.8 1621.06,1656.4
GND on Int1 (GND) "GND_L02_P010" (solid, pour order 10): 1020,3975 1985,3975 1985,1020 1020,1020
VCC on Bottom Layer "VCC_L04_P008" (solid, pour order 8): 1020,3975 1985,3975 1985,1020 1020,1020
AGND on Int2 (AGND) "AGND_L04_P009" (solid, pour order 9): 1985,3975 1985,1020 1020,1020 1020,3975

## Silkscreen, mask and mechanical layers (free items; w line width, h text height)
Top Overlay:
  drawing of 17 lines, arcs and shapes, not listed
  text "BBA" at 1897.73,3009.36 h30
  text "GND" at 1256.12,2680.91 h30
  text "HYDROPHONE" at 1096.07,2628.92 h30
  text "F1" at 1437.7,2450.23 h30
  text "F3" at 1690.27,2308.2 h30
  text "F2" at 1432.39,2301.23 h30
  text "A" at 1786.66,2084.87 h30
  text "+" at 1790.43,1987.87 h30
  text "-" at 1787.94,1884.46 h30
  text "AMP" at 1312.5,1796.76 h30
  text "F4" at 1281.98,1622.97 h30
  text "0" at 1939.24,1424.05 h30
  text "CLK" at 1565.24,1291.1 h30
  text "DOUT" at 1561.47,1189.86 h30
  text "1" at 1939.24,1132.19 h30
  text "CS" at 1571.83,1092.86 h30
  text "2 1 0" at 1763.26,1039.34 h30
Bottom Overlay:
  drawing of 30 lines, arcs and shapes, not listed
  text "Acoustics Single  / Channel PCB" at 1963.19,2840 h50
  text "v1.1.2" at 1624.96,2622 h50
Mechanical 1:
  the board outline again, w10

## Dimensions
1000.59,3054.75 to 2009.42,3054.75 on Mechanical 1
1000.59,1001.11 to 1000.59,3054.75 on Mechanical 1

## Text inside footprints (layer, text, board x,y; h text height)
J5: Mechanical 13 "PCB Edge" at 2054.62,2171.37 h39.46 r90
J7: Mechanical 13 "8.509" at 1203.66,1476.08 h10 r270; Mechanical 13 "1" at 1571.14,1341.99 h30 r270; Mechanical 13 "2.540" at 1616.14,1454.07 h10 r270; Mechanical 13 "5.080" at 1588.66,1406.59 h10 r270; Mechanical 13 "8.128" at 929.64,1229.07 h10 r270; Mechanical 13 "3" at 1570.8,1050.09 h30 r270